# EAGLE board goodfet10 (EAGLE 5.04)
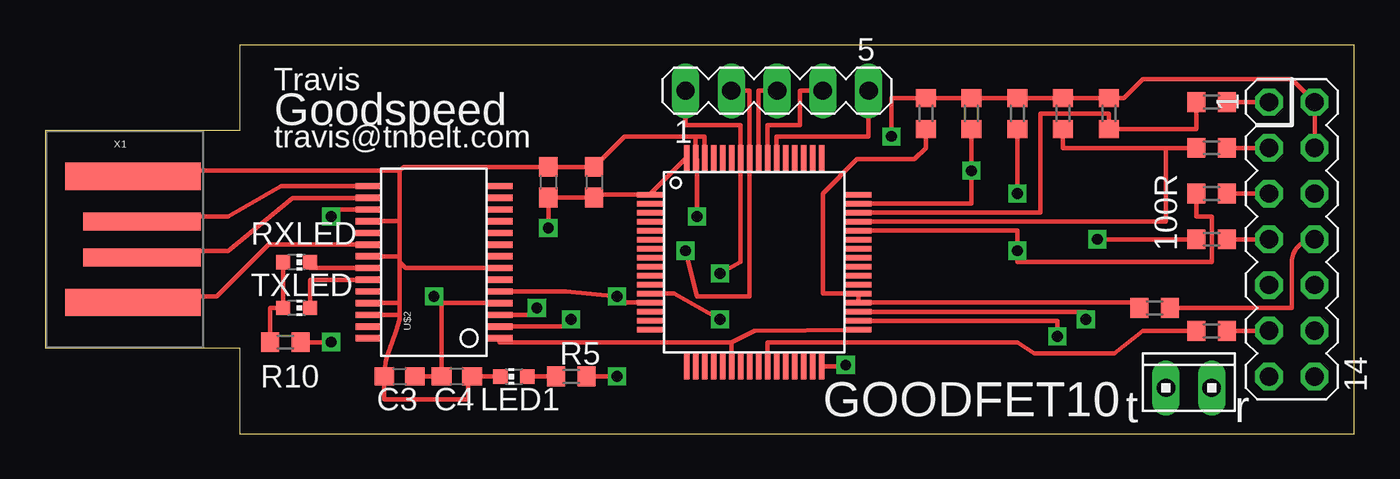
[diagram p0: board, top side]
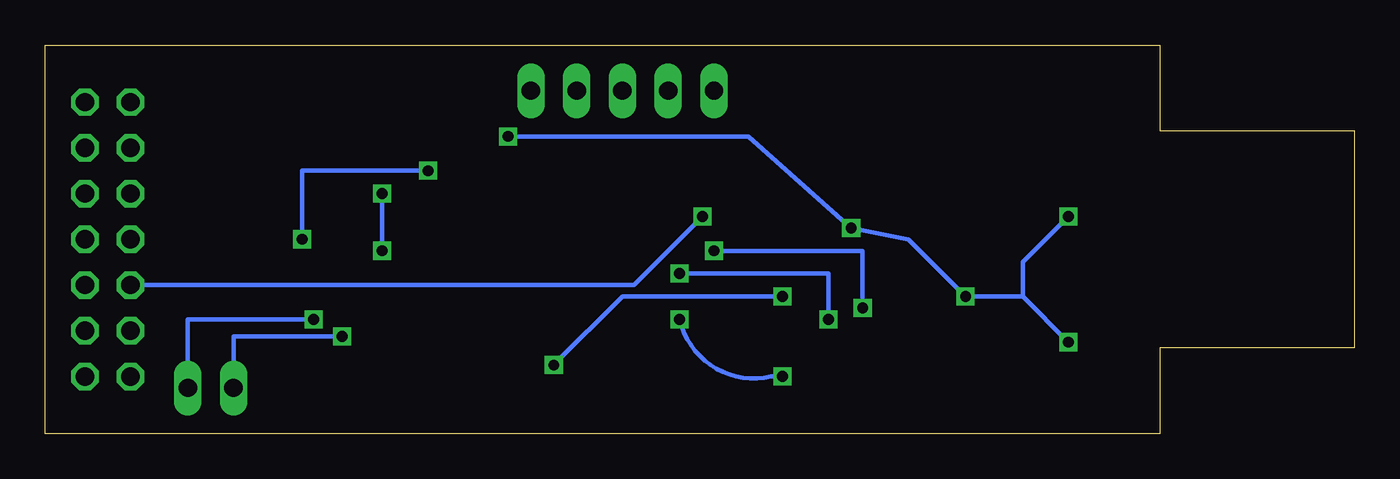
[diagram p1: board, bottom side, seen from below]

Size 72.69 x 21.59 mm. Coordinates in mm from the lower left corner, seen from the top.
Outline: 10.79,0 72.69,0 72.69,21.59 10.79,21.59 10.79,16.83 0,16.83 0,4.76 10.79,4.76 10.79,0
Copper layers (1*16): Top 0.035mm / dielectric 1.5mm / Bottom 0.035mm
Design rules "default": minimum track width 10mil, minimum drill 24mil, track to track 8mil, track to pad 8mil, pad to pad 8mil, via to via 8mil, smd to smd 8mil, copper to edge 40mil, drill to drill 8mil, minimum pad ring 10mil, minimum via ring 8mil, stop-mask expansion 4mil, vias tented up to drill 0mil, thermal gap 10mil

## Footprints (pad centres in the part's own frame; a part is rotated, then mirrored left to right if it is on the bottom)
C0603 = smd 1.1 x 1: 1 -0.85,0; 2 0.85,0
CHIP-LED0603 = smd 0.8 x 0.8: A 0,-0.75; C 0,0.75
R0603 = smd 1 x 1.1: 1 -0.85,0; 2 0.85,0
10X02MTA = drill 1.016 long: 1 1.27,0; 2 -1.27,0
MA07-2 = drill 1.016 octagon: 1 -7.62,-1.27; 2 -7.62,1.27; 3 -5.08,-1.27; 4 -5.08,1.27; 5 -2.54,-1.27; 6 -2.54,1.27; 7 0,-1.27; 8 0,1.27; 9 2.54,-1.27; 10 2.54,1.27; 11 5.08,-1.27; 12 5.08,1.27; 13 7.62,-1.27; 14 7.62,1.27
MA05-1 = drill 1.016 long: 1 -5.08,0; 2 -2.54,0; 3 0,0; 4 2.54,0; 5 5.08,0
PM/PAG64 = smd 1.4 x 0.3: 1 -5.8,3.75; 2 -5.8,3.25; 3 -5.8,2.75; 4 -5.8,2.25; 5 -5.8,1.75; 6 -5.8,1.25; 7 -5.8,0.75; 8 -5.8,0.25; 9 -5.8,-0.25; 10 -5.8,-0.75; 11 -5.8,-1.25; 12 -5.8,-1.75; 13 -5.8,-2.25; 14 -5.8,-2.75; 15 -5.8,-3.25; 16 -5.8,-3.75; 33 5.8,-3.75; 34 5.8,-3.25; 35 5.8,-2.75; 36 5.8,-2.25; 37 5.8,-1.75; 38 5.8,-1.25; 39 5.8,-0.75; 40 5.8,-0.25; 41 5.8,0.25; 42 5.8,0.75; 43 5.8,1.25; 44 5.8,1.75; 45 5.8,2.25; 46 5.8,2.75; 47 5.8,3.25; 48 5.8,3.75 | smd 0.3 x 1.4: 17 -3.75,-5.8; 18 -3.25,-5.8; 19 -2.75,-5.8; 20 -2.25,-5.8; 21 -1.75,-5.8; 22 -1.25,-5.8; 23 -0.75,-5.8; 24 -0.25,-5.8; 25 0.25,-5.8; 26 0.75,-5.8; 27 1.25,-5.8; 28 1.75,-5.8; 29 2.25,-5.8; 30 2.75,-5.8; 31 3.25,-5.8; 32 3.75,-5.8; 49 3.75,5.8; 50 3.25,5.8; 51 2.75,5.8; 52 2.25,5.8; 53 1.75,5.8; 54 1.25,5.8; 55 0.75,5.8; 56 0.25,5.8; 57 -0.25,5.8; 58 -0.75,5.8; 59 -1.25,5.8; 60 -1.75,5.8; 61 -2.25,5.8; 62 -2.75,5.8; 63 -3.25,5.8; 64 -3.75,5.8
SSOP28DB = smd 0.348 x 1.397: 1 -4.225,-3.656; 2 -3.575,-3.656; 3 -2.925,-3.656; 4 -2.275,-3.656; 5 -1.625,-3.656; 6 -0.975,-3.656; 7 -0.325,-3.656; 8 0.325,-3.656; 9 0.975,-3.656; 10 1.625,-3.656; 11 2.275,-3.656; 12 2.925,-3.656; 13 3.575,-3.656; 14 4.225,-3.656; 15 4.225,3.656; 16 3.575,3.656; 17 2.925,3.656; 18 2.275,3.656; 19 1.625,3.656; 20 0.975,3.656; 21 0.325,3.656; 22 -0.325,3.656; 23 -0.975,3.656; 24 -1.625,3.656; 25 -2.275,3.656; 26 -2.925,3.656; 27 -3.575,3.656; 28 -4.225,3.656
USB-A-PCB = smd 7.5 x 1.5: 5V -0.2,-3.5; GND -0.2,3.5 | smd 6.5 x 1: USB_M 0.3,-1; USB_P 0.3,1

## Placement (x,y rotation side)
C1  10µF  [C0603]  27.94,13.97 270 top
C2  100nF  [C0603]  30.48,13.97 270 top
C3  10µF  [C0603]  19.68,3.18 0 top
C4  100nF  [C0603]  22.86,3.18 180 top
LED1  [CHIP-LED0603]  26.04,3.18 90 top
R1  47K  [R0603]  51.44,17.78 90 top
R2  47K  [R0603]  59.05,17.78 90 top
R3  47K  [R0603]  56.52,17.78 90 top
R4  47K  [R0603]  53.98,17.78 90 top
R5  330  [R0603]  29.21,3.18 0 top
R6  [R0603]  64.77,18.42 180 top
R7  [R0603]  64.77,15.88 180 top
R8  [R0603]  64.77,13.33 180 top
R9  [R0603]  64.77,10.79 180 top
R10  300  [R0603]  13.33,5.08 0 top
R11  [R0603]  64.77,5.71 180 top
R12  47K  [R0603]  48.9,17.78 90 top
R13  [R0603]  61.6,6.99 0 top
RXLED  [CHIP-LED0603]  13.97,9.53 270 top
SER  [10X02MTA]  63.5,2.54 0 top
SV1  [MA07-2]  69.21,10.79 270 top
TP  [MA05-1]  40.64,19.05 0 top
TXLED  [CHIP-LED0603]  13.97,6.99 270 top
U$1  F161X---PM64  [PM/PAG64]  39.37,9.53 0 top
U$2  FT232RL-BASICSSOP  [SSOP28DB]  21.59,9.53 90 top
X1  USBPCB  [USB-A-PCB]  5.08,10.79 0 top

## Library data of the parts
C1-C4 R1-R5 R10 R12 = rcl
LED1 RXLED TXLED = led
R6-R9 R11 R13 = resistor
SER = con-amp
SV1 TP = con-lstb
U$1 = TI_MSP430_v122
U$2 X1 = SparkFun

## Nets
DTR: TP.1 U$1.58 U$2.2
GND: C1.1 C2.1 C3.1 C4.1 LED1.C SV1.9 U$1.62 U$1.63 U$2.7 U$2.18 U$2.21 U$2.25 U$2.26 X1.GND
N$1: R5.2 U$1.12
N$2: LED1.A R5.1
N$3: U$2.15 X1.USB_P
N$4: U$2.16 X1.USB_M
N$5: U$2.20 X1.5V
N$6: RXLED.C U$2.22
N$7: TXLED.C U$2.23
N$8: R10.1 RXLED.A TXLED.A
N$9: SER.1 U$1.35
N$10: SER.2 U$1.34
N$11: TP.3 U$1.56
N$12: TP.4 U$1.55
N$13: TP.5 U$1.54
N$14: R6.1 SV1.1
N$15: R7.1 SV1.3
N$16: R8.1 SV1.5
N$17: R9.1 SV1.7
N$18: R11.1 SV1.11
N$19: R13.2 SV1.8
RST: R11.2 U$1.26
RTS: TP.2 U$1.57 U$2.3
RXD: U$1.22 U$1.33 U$2.1
TCK: R1.1 R9.2 U$1.47
TDI: R3.1 R7.2 U$1.45
TDO: R2.1 R6.2 U$1.46
TEST: R12.1 R13.1 U$1.36 U$1.37
TMS: R4.1 R8.2 U$1.44
TXD: U$1.13 U$1.32 U$2.5
VCC: C1.2 C2.2 C3.2 C4.2 R1.2 R2.2 R3.2 R4.2 R10.2 R12.2 SV1.2 SV1.4 U$1.1 U$1.64 U$2.4 U$2.17

## Tracks (layer width: path | path; a pad name or v marks a point on that pad's centre or on a via)
DTR  (via drill 0.6)
  Top 0.254: TP.1 35.56,17.14 38.62,17.14 U$1.58 38.62,9.53 v37.47,8.89 | U$2.2 29.21,5.95 v29.21,6.35
  Bottom 0.254: v29.21,6.35 29.21,8.89 v37.47,8.89
GND  (via drill 0.6)
  Top 0.254: 19.68,14.61 19.68,11.8 | 19.68,14.61 5.2,14.61 X1.GND | 19.68,11.8 U$2.18 | 19.68,11.8 19.68,10.16 | 19.68,10.16 19.68,9.53 | 19.68,9.53 19.68,7.62 | 19.68,7.62 19.68,6.6 | 19.68,6.6 U$2.26 | 19.68,6.6 19.68,6.35 arc-2 19.05,4.45 arc19 C3.1 18.83,1.91 23.49,1.91 23.49,3.18 C4.1 LED1.C | U$2.25 19.68,7.25 19.68,7.62 | U$2.21 19.68,9.85 19.68,10.16 | U$2.7 20.01,9.2 19.68,9.53 | 36.12,16.51 U$1.63 36.2,15.25 v36.2,12.07 | 36.12,16.51 32.17,16.51 C2.1 C1.1 19.9,14.82 19.68,14.61 | U$1.62 36.62,16.51 36.12,16.51
  Bottom 0.254: SV1.9 40.01,8.25 v36.2,12.07
N$1  (via drill 0.6)
  Top 0.254: R5.2 v31.75,3.18 | v37.47,6.35 34.93,7.78 U$1.12
  Bottom 0.254: v31.75,3.18 32.39,3.18 arc90 v37.47,6.35
N$2
  Top 0.254: LED1.A R5.1
N$3
  Top 0.254: U$2.15 13.11,13.75 10.16,12.07 5.65,12.07 X1.USB_P
N$4
  Top 0.254: U$2.16 13.73,13.1 10.16,10.16 5.75,10.16 X1.USB_M
N$5
  Top 0.254: U$2.20 12.4,10.5 9.52,7.62 5.2,7.62 X1.5V
N$6
  Top 0.254: U$2.22 14.72,9.2 RXLED.C
N$7
  Top 0.254: U$2.23 14.72,8.55 TXLED.C
N$8
  Top 0.254: RXLED.A TXLED.A 12.48,6.99 R10.1
N$9  (via drill 0.6)
  Top 0.254: U$1.35 57.79,6.78 v57.79,6.35
  Bottom 0.254: v57.79,6.35 64.77,6.35 SER.1
N$10  (via drill 0.6)
  Top 0.254: U$1.34 56.2,6.28 v56.2,5.4
  Bottom 0.254: v56.2,5.4 62.23,5.4 SER.2
N$11
  Top 0.254: U$1.56 39.62,19.05 TP.3
N$12
  Top 0.254: U$1.55 40.12,17.14 41.91,17.14 41.91,19.05 TP.4
N$13
  Top 0.254: U$1.54 40.62,16.51 45.72,16.51 TP.5
N$14
  Top 0.254: R6.1 SV1.1
N$15
  Top 0.254: R7.1 SV1.3
N$16
  Top 0.254: R8.1 SV1.5
N$17
  Top 0.254: R9.1 SV1.7
N$18
  Top 0.254: R11.1 SV1.11
N$19
  Top 0.254: R13.2 69.21,6.99 69.21,9.53 arc-90 SV1.8
RST
  Top 0.254: U$1.26 40.12,5.08 53.98,5.08 54.93,4.45 59.37,4.45 60.96,5.71 R11.2
RTS  (via drill 0.6)
  Top 0.254: TP.2 39.12,19.05 U$1.57 39.12,7.62 36.2,7.62 v35.56,10.16 | U$2.3 27.3,6.6 v27.3,6.99
  Bottom 0.254: v27.3,6.99 27.3,10.16 v35.56,10.16
RXD
  Top 0.254: U$2.1 25.25,5.08 38.1,5.08 | 38.1,5.08 39.4,5.71 U$1.33 | U$1.22 38.12,5.08 38.1,5.08
TCK  (via drill 0.6)
  Top 0.254: U$1.47 51.44,12.78 v51.44,14.61 R1.1 | 64.13,10.79 R9.2 v58.42,10.79
  Bottom 0.254: v58.42,10.79 58.42,14.61 v51.44,14.61
TDI
  Top 0.254: 62.23,15.88 56.52,15.88 R3.1 | 62.23,15.88 R7.2 | U$1.45 62.23,11.78 62.23,15.88
TDO
  Top 0.254: R6.2 63.92,16.93 R2.1 59.05,17.78 55.25,17.78 55.25,12.28 U$1.46
TEST
  Top 0.254: R13.1 60.74,7.28 U$1.36 U$1.37 43.18,7.78 43.18,13.33 45.09,15.24 48.26,15.24 48.9,15.88 R12.1
TMS  (via drill 0.6)
  Top 0.254: U$1.44 53.98,11.28 v53.98,10.16 53.98,9.53 64.77,9.53 64.77,12.07 63.92,12.07 R8.2 | v53.98,13.33 R4.1
  Bottom 0.254: v53.98,10.16 v53.98,13.33
TXD  (via drill 0.6)
  Top 0.254: U$1.32 44.37,3.72 v44.45,3.81 | U$2.5 28.93,7.9 v31.75,7.62 31.75,7.28 U$1.13
  Bottom 0.254: v44.45,3.81 40.64,7.62 v31.75,7.62
VCC  (via drill 0.6)
  Top 0.254: C3.2 C4.2 22.01,7.25 | 22.01,7.25 U$2.4 | R10.2 v15.88,5.08 | 22.01,7.25 21.96,7.25 v21.59,7.62 | v15.88,12.07 16.26,12.45 U$2.17 | U$1.64 U$1.1 30.48,13.28 C2.2 C1.2 v27.94,11.43 | SV1.4 SV1.2 69.21,19.68 60.96,19.68 59.91,18.63 R2.2 R3.2 R4.2 R1.2 R12.2 46.99,18.63 v46.99,16.51
  Bottom 0.254: 18.41,7.62 v21.59,7.62 24.76,10.79 v27.94,11.43 33.66,16.51 v46.99,16.51 | v15.88,5.08 18.41,7.62 | 18.41,7.62 18.41,9.53 v15.88,12.07

## Text on the board
tPlace: Travis | Goodspeed | travis@tnbelt.com | 100R | GOODFET10
tNames: t | r